# Altium PCB Recepteur.PcbDoc
Units mil, origin at the board's own origin, x right, y up, seen from the top; angles counter-clockwise.
Board outline 3800 x 3795 mil, 2 copper layers (Top Layer, Bottom Layer); 36 components, 38 nets, 132 pads, 0 vias.
Unrouted connection lines stored in the file: 3.
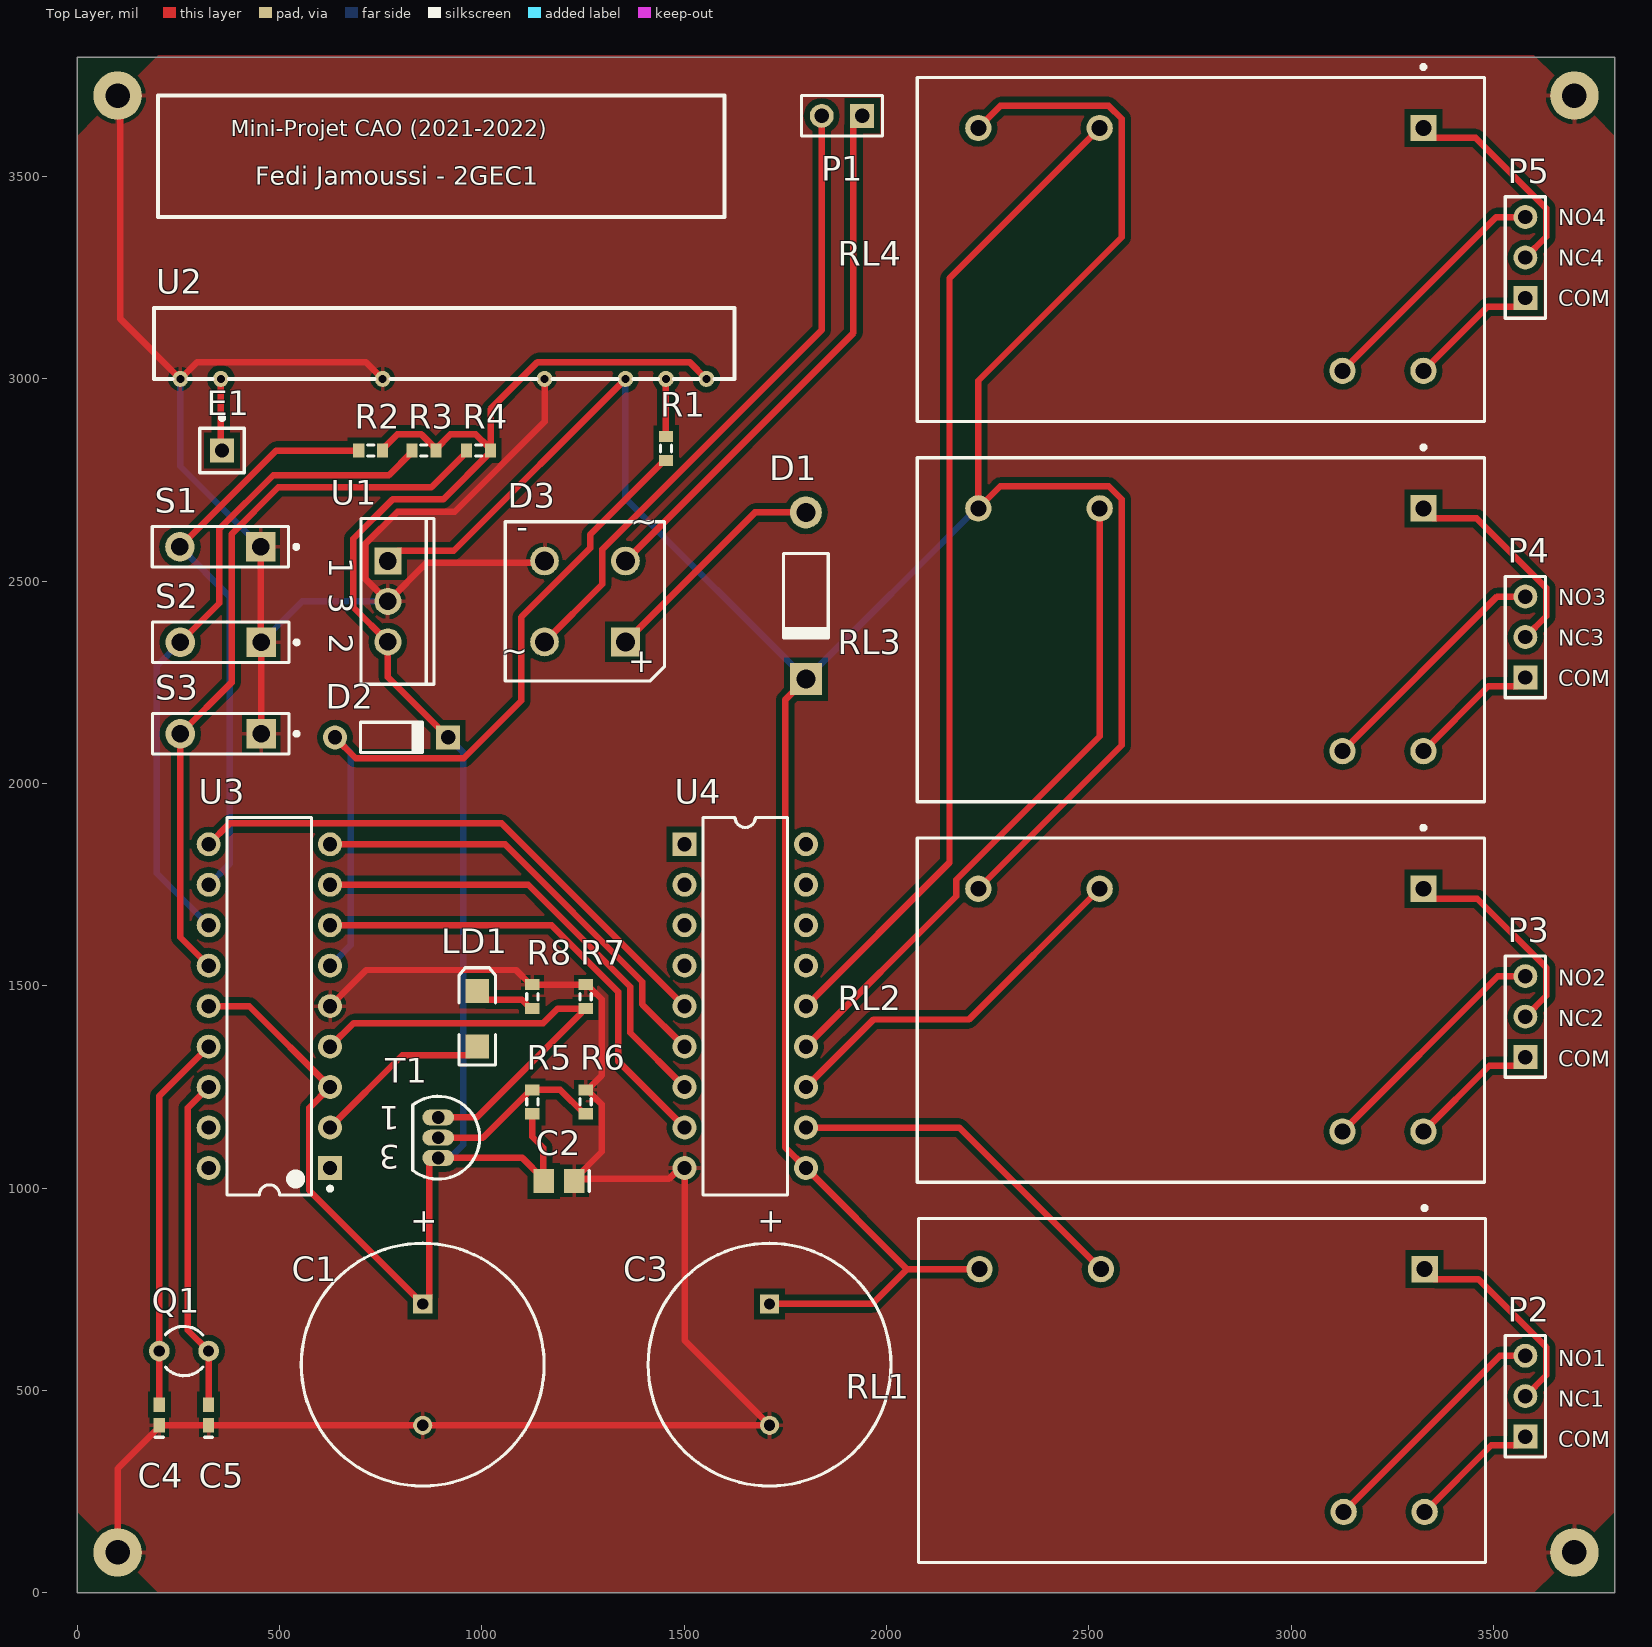
[diagram p0: Top Layer view]
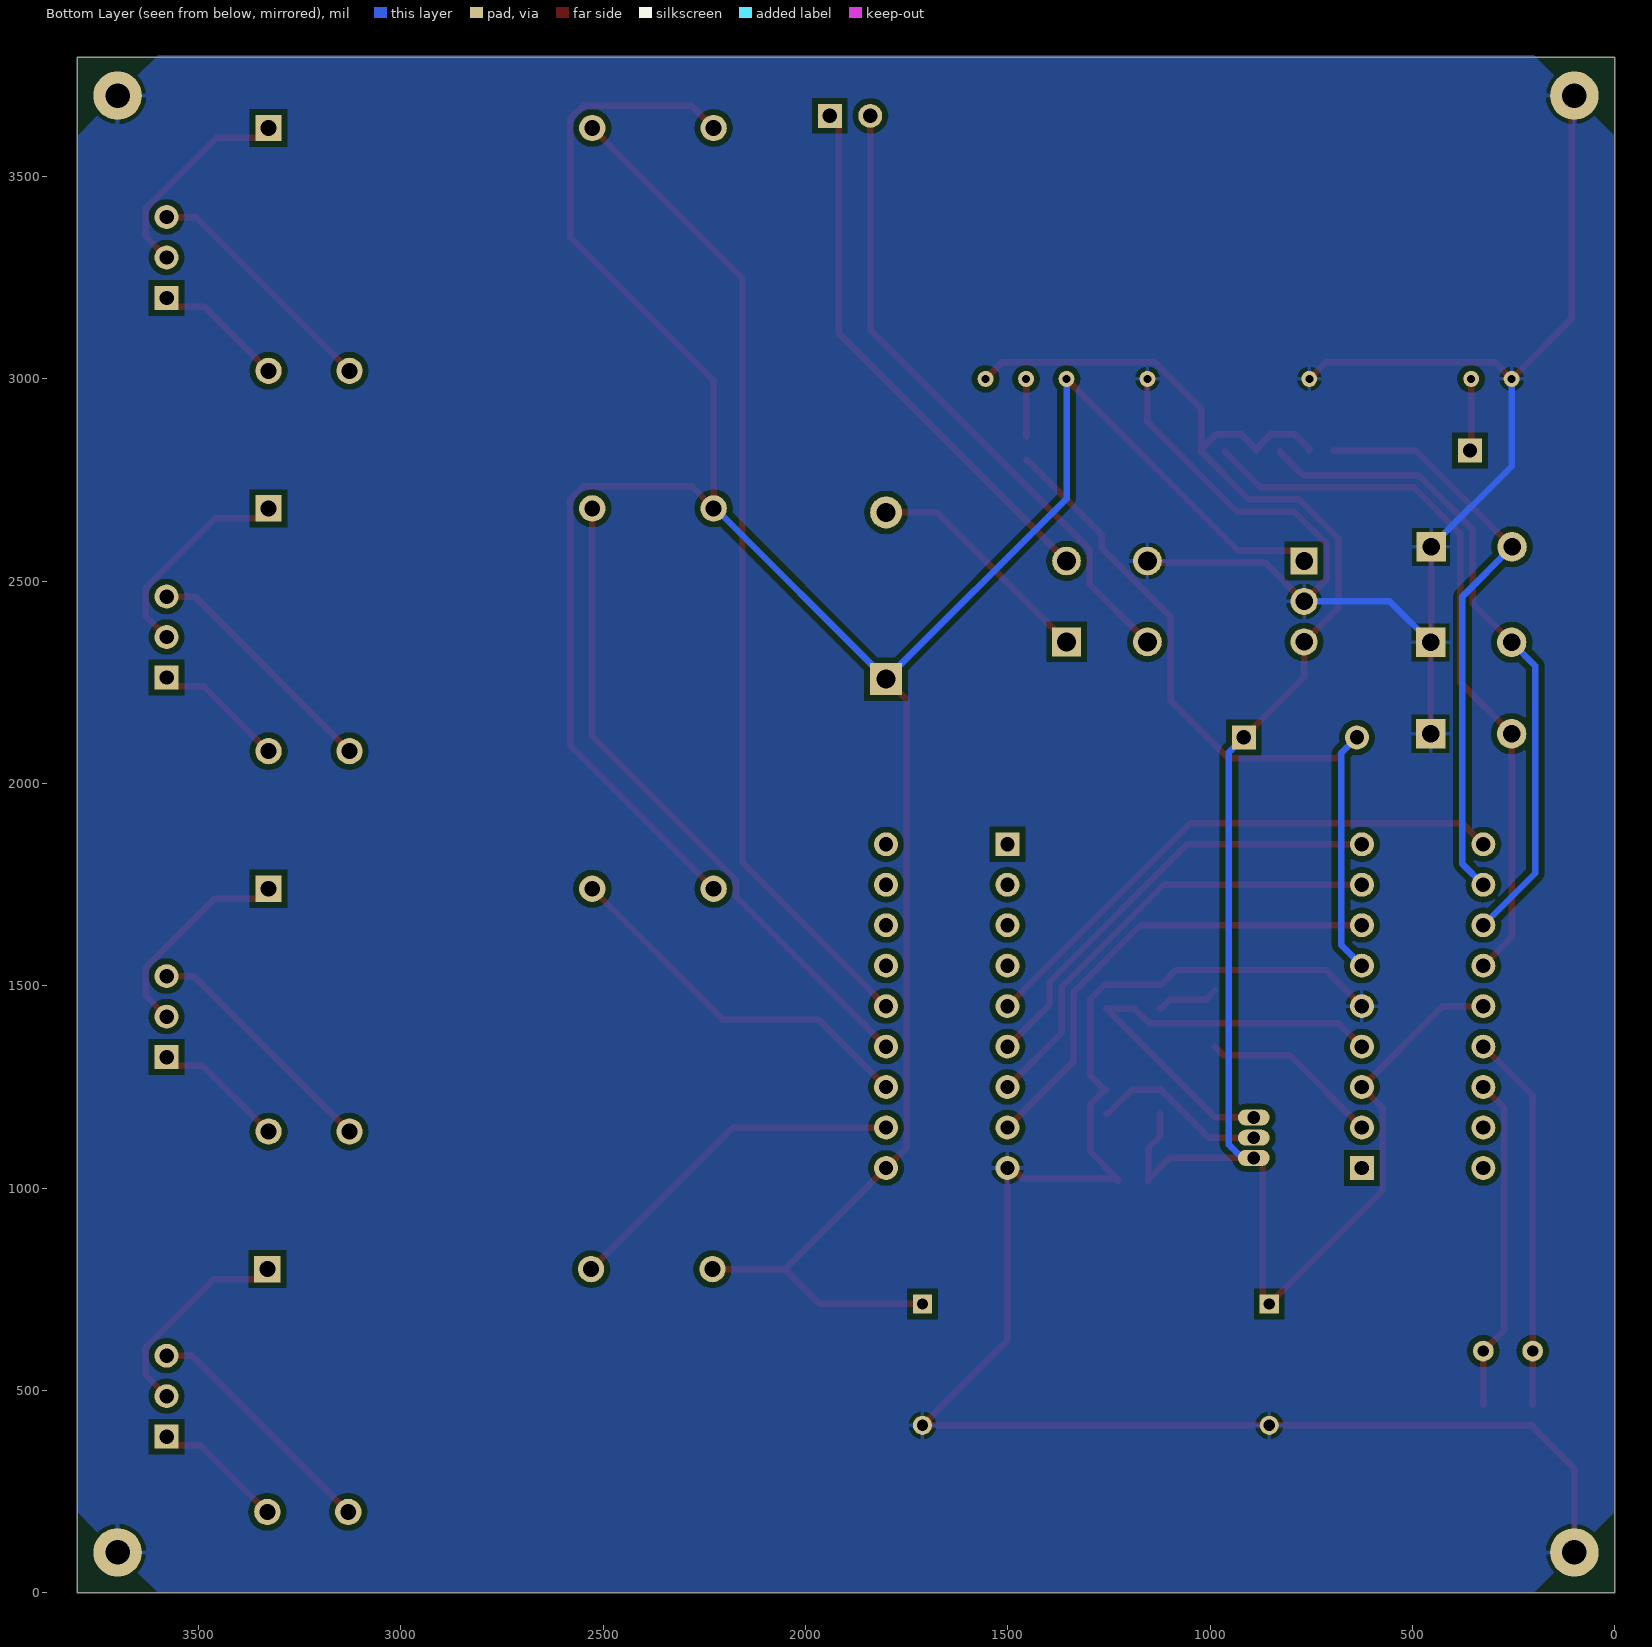
[diagram p1: Bottom Layer view, seen from below]

## Layer stack, top to bottom
Top Solder: solder mask 0.4, Solder Resist, Dk 3.5
Top Layer: signal copper 1.4
Dielectric 1: dielectric 12.6, FR-4, Dk 4.8
Bottom Layer: signal copper 1.4
Bottom Solder: solder mask 0.4, Solder Resist, Dk 3.5

## Board outline
0,3794.95 0,-0.05 3800,-0.05 3800,3794.95

## Design rules (kind name [scope] priority, off if disabled: settings)
Clearance [All] p1: gap=14 ignorepadtopadclearanceinfootprint=FALSE
PolygonConnect [All] p1: connectstyle=Relief reliefconductorwidth=10 reliefentries=4 polygonreliefangle="90 Angle" airgapwidth=10
RoutingVias [All] p1: holewidth=32 width=80 viastyle="Through Hole" minholewidth=28 minwidth=50 maxholewidth=28 maxwidth=50
SolderMaskExpansion [All] p1: expansion=4
Width [All] p1: maxlimit=16 minlimit=16 preferedwidth=16
30 further rules are at their usual default settings.

## Classes and differential pairs
component class Reset: C2 R5 R6 R7 T1
component class Pullup: R2 R3 R4 S1 S2 S3
component class Oscillateur: C4 C5 Q1
component class "Module Reception": E1 R1 U2
component class "Microcontroleur PIC": U3
component class "Indicateur LED": LD1 R8
component class Canaux: C3 P2 P3 P4 P5 RL1 RL2 RL3 RL4 U4
component class Alimentation: C1 D1 D2 D3 P1 U1

## Components (designator, comment, footprint, x,y, rotation, side; value= is the part's Value field where it differs from the comment)
C1 "Cap Pol1" RB7.6-15 854,563.95 r90 top value=100pF
C2 "C0805C" 0805 1190.76,1017.74 r180 top value=100nF
C3 "Cap Pol1" RB7.6-15 1711,563.95 r90 top value=470uF
C4 "C0402" 0402 202.95,439.54 r90 top value=22pF
C5 "C0402" 0402 325,439.54 r90 top value=22pF
D1 "Diode 1N4007" DO-41 1801,2463.95 r270 top
D2 "Diode 1N4148" DO-35 777,2113.95 r0 top
D3 "Bridge1" D-38 1255,2449.95 r180 top
E1 "Antenna" PIN1 358,2822.95 r0 top
LD1 "LED2" 3.2X1.6X1.1 988.76,1418.74 r90 top
P1 "Header 2" HDR1X2 1940,3650 r180 top
P2 "Header 3" HDR1X3 3579,385.95 r90 top
P3 "Header 3" HDR1X3 3579,1323.95 r90 top
P4 "Header 3" HDR1X3 3579,2261.95 r90 top
P5 "Header 3" HDR1X3 3579,3199.95 r90 top
Q1 "XTAL" R38 263.98,597.54 r90 top value=4MHz
R1 "Res3" J1-0603 1455,2827.95 r90 top value=10K
R2 "Res3" J1-0603 725.47,2822.95 r0 top value=10K
R3 "Res3" J1-0603 857,2822.95 r0 top value=10K
R4 "Res3" J1-0603 992,2822.95 r0 top value=10K
R5 "Res3" J1-0603 1124.76,1213.27 r270 top value=470K
R6 "Res3" J1-0603 1256.76,1213.27 r270 top value=2.2M
R7 "Res3" J1-0603 1256.76,1473.46 r270 top value=2.2M
R8 "Res3" J1-0603 1124.76,1473.46 r270 top value=1K
RL1 "Relay" MODULE5B 2780,499.95 r180 top
RL2 "Relay" MODULE5B 2777,1439.95 r180 top
RL3 "Relay" MODULE5B 2777,2379.95 r180 top
RL4 "Relay" MODULE5B 2777,3319.95 r180 top
S1 "SW-SPST" SPST-2 354,2584.95 r180 top
S2 "SW-SPST" SPST-2 355,2348.95 r180 top
S3 "SW-SPST" SPST-2 355,2122.95 r180 top
T1 "BC557B" 29-04 892.29,1124.74 r180 top
U1 "L7805CV" TO220ABN 768,2449.95 r270 top
U2 "RX4MM5/F" RX4MM5/F 870,3089.95 r0 top
U3 "PIC16F84A-04/P" PDIP300-P18 475,1449.85 r180 top
U4 "ULN2803A" A18 1651,1449.85 r270 top

## Footprints (in the part's own frame and the unit in brackets; to place one, negate y for a bottom-side part, rotate by r counter-clockwise, add the part's x,y. Pads: shape width x height; smd on the part's side, far side on the other; paste and mask are expansions set on the pad)
3.2X1.6X1.1 [mm] "SMT LED; 2 Flat Leads"
  rect 1.5x1.5 smd: 1(-1.75,0) 2(1.75,0)
  silkscreen extent -2.9,-1.15 3.2,1.15
29-04 [mm] "TO, Flat Index; 3 In-Line, Axial Leads; Body Dia. 4.8mm; Leads 0.48 x 0.5 mm (max)"
  oval 2x1 hole 0.8: 1(0,-1.27) 2(0,0) 3(0,1.27)
  silkscreen extent -2.6,-2.6 1.6,2.6
0402 [mm] "Chip Capacitor; Body 1.0 x 0.5 mm (LxW typ)"
  rect 0.9x0.7 smd: 1(-0.65,0) 2(0.65,0)
  silkscreen extent -1.4,-0.25 -1.4,0.25
0805 [mm] "Chip Capacitor; Body 2.0 x 1.2 mm (LxW typ)"
  rect 1.3x1.5 smd: 1(-0.95,0) 2(0.95,0)
  silkscreen extent -1.9,-0.65 -1.9,0.65
A18 [mm] "DIP; 18 Leads; Row Spacing 7.62 mm; Pitch 2.54 mm"
  rect 1.5x1.5 hole 0.9: 1(-10.16,-3.81)
  round 1.5 hole 0.9: 2(-7.62,-3.81) 3(-5.08,-3.81) 4(-2.54,-3.81) 5(0,-3.81) 6(2.54,-3.81) 7(5.08,-3.81) 8(7.62,-3.81) 9(10.16,-3.81) 10(10.16,3.81) 11(7.62,3.81) 12(5.08,3.81) 13(2.54,3.81) 14(0,3.81) 15(-2.54,3.81) 16(-5.08,3.81) 17(-7.62,3.81) 18(-10.16,3.81)
  silkscreen extent -11.85,-2.65 11.85,2.65
D-38 [mm] "Bridge Rectifier; 4 Terminals; Body 9.4 x 9.4 mm (typ); Pitch 5.08 mm"
  rect 1.8x1.8 hole 1.2: 1(-2.54,2.54)
  round 1.8 hole 1.2: 2(-2.54,-2.54) 3(2.54,-2.54) 4(2.54,2.54)
  silkscreen extent -5,-5 5,5, body extent -5,-5 5,5, height 9.91
DO-35 [mm] "Diode, Axial; Body 3.8 x 1.9 mm (LxDia. max), Lead Dia. 0.53 mm (max)"
  round 1.5 hole 0.9: 1(-3.55,0)
  rect 1.5x1.5 hole 0.9: 2(3.55,0)
  silkscreen extent -1.95,-0.95 2.05,0.95
DO-41 [mm] "Diode, Axial; Body 5.2 x 2.7 mm (LxDia. max), Lead Dia. 0.86 mm (max)"
  round 2 hole 1.2: 1(-5.23,0)
  rect 2x2 hole 1.2: 2(5.23,0)
  silkscreen extent -2.65,-1.4 2.75,1.4
HDR1X2 [mm] "Connector; Header; 2 Position"
  rect 1.5x1.5 hole 0.9: 1(0,0)
  round 1.5 hole 0.9: 2(2.54,0)
  silkscreen extent -1.27,-1.27 3.81,1.27
HDR1X3 [mm] "Connector; Header; 3 Position"
  rect 1.5x1.5 hole 0.9: 1(0,0)
  round 1.5 hole 0.9: 2(2.54,0) 3(5.08,0)
  silkscreen extent -1.27,-1.27 6.35,1.27
J1-0603 [mm] "Chip Resistor, Body 1.6x0.8mm, IPC High Density"
  rect 0.7x0.9 smd: 1(-0.75,0) 2(0.75,0)
  silkscreen extent -0.2,-0.35 0.2,0.35, body extent -0.85,-0.48 0.85,0.48, height 0.9
MODULE5B [mm] "DIP; 5 Round Pins; Row Space 15.24 mm; Pitch 2.54 mm"
  rect 1.65x1.65 hole 1: 1(-13.97,-7.62)
  round 1.65 hole 1: 2(-13.97,7.62) 3(-8.89,7.62) 4(13.97,-7.62) 5(6.35,-7.62)
  silkscreen extent -17.8,-11.57 17.8,10.8, body extent -17.8,-10.8 17.8,10.8, height 14
PDIP300-P18 [mm] "DIP, 18-Leads, Row Spacing 7.62mm, Pitch 2.54mm, Body 22.9x6.6mm"
  rect 1.5x1.5 hole 0.9: 1(-3.81,10.16)
  round 1.5 hole 0.9: 2(-3.81,7.62) 3(-3.81,5.08) 4(-3.81,2.54) 5(-3.81,0) 6(-3.81,-2.54) 7(-3.81,-5.08) 8(-3.81,-7.62) 9(-3.81,-10.16) 10(3.81,-10.16) 11(3.81,-7.62) 12(3.81,-5.08) 13(3.81,-2.54) 14(3.81,0) 15(3.81,2.54) 16(3.81,5.08) 17(3.81,7.62) 18(3.81,10.16)
  silkscreen extent -3.94,-11.85 2.65,11.85, body extent -3.6,-11.8 3.6,11.8, height 5.34
PIN1 [mm] "Generic Antenna; 1 Lead"
  rect 1.5x1.5 hole 0.9: 1(0,0)
  silkscreen extent -1.4,-1.4 1.4,2.17
R38 [mm] "Crystal, Thru-Hole; 2 Leads; Body 3.1 x 8.2 mm (Dia.xH)"
  round 1.3 hole 0.7: 1(0,1.55) 2(0,-1.55)
  silkscreen extent -1.55,-1.19 1.55,1.17
RB7.6-15 [mm] "Polarized Capacitor (Radial); 2 Leads"
  rect 1.2x1.2 hole 0.7: 1(3.81,0)
  round 1.2 hole 0.7: 2(-3.81,0)
  silkscreen extent -7.62,-7.62 7.62,7.62
RX4MM5/F [mm] "RF Signal Receiver"
  round 1 hole 0.5: 2(-15.621,-2.286) 3(-13.081,-2.286) 7(-2.921,-2.286) 11(7.239,-2.286) 13(12.319,-2.286) 14(14.859,-2.286) 15(17.399,-2.286)
  silkscreen extent -17.27,-2.29 19.18,2.16
SPST-2 [mm] "Switch; 2 Leads"
  rect 1.85x1.85 hole 1.1: 1(-2.54,0)
  round 1.85 hole 1.1: 2(2.54,0)
  silkscreen extent -4.89,-1.27 4.28,1.27
TO220ABN [mm] "TO, Thru-Hole, Vertical, Heatsink Mounted; 3 In-Line Leads; Pitch 2.54 mm; Pin sequence 1, 3, 2"
  rect 1.7x1.7 hole 1.1: 1(-2.54,0)
  round 1.7 hole 1.1: 2(2.54,0) 3(0,0)
  silkscreen extent -5.2,-1.7 5.2,2.9

## Part data
C1 C3: "Polarized Capacitor (Radial)", LatestRevisionDate=17-Jul-2002, LatestRevisionNote="Re-released for DXP Platform.", PackageDescription="Polarized Capacitor (Radial); 2 Leads", PackageReference=RB7.6-15, Published=8-Jun-2000, Publisher="Altium Limited"
C2: library part C0805, "Ceramic Chip Capacitor - Standard", PackageDocument=Mar-2001, Code_IPC=2012[0805], Code_JEITA=0805, ComponentLink1Description="Manufacturer Link", ComponentLink1URL=http://www.kemet.com/, ComponentLink2Description=Datasheet, ComponentLink2URL=http://www.kemet.com/kemet/web/homepage/kechome.nsf/vapubfilesname/F3102TA.pdf/$file/F3102TA.pdf, DatasheetDocument=Mar-2001, LatestRevisionDate=19-Mar-2004, LatestRevisionNote="Silkscreen size reduced.", Note="Footprint corresponds to dimensions for bulk cassette packaging. This case size has tightened tolerances.", PackageReference=0805, Published=17-Jul-2002, Publisher="Altium Limited"
C4 C5: "Ceramic Chip Capacitor - Standard", PackageDocument=Mar-2001, Code_IPC="1005 [0402]", Code_JEITA=0402, ComponentLink1Description="Manufacturer Link", ComponentLink1URL=http://www.kemet.com/, ComponentLink2Description=Datasheet, ComponentLink2URL=http://www.kemet.com/kemet/web/homepage/kechome.nsf/vapubfilesname/F3102TA.pdf/$file/F3102TA.pdf, DatasheetDocument=Mar-2001, LatestRevisionDate=19-Mar-2004, LatestRevisionNote="Silkscreen size reduced.", Note="Footprint corresponds to dimensions for bulk cassette packaging. This case size has tightened tolerances.", PackageReference=0402, Published=17-Jul-2002, Publisher="Altium Limited"
D1: "1 Amp General Purpose Rectifier", Code_JEDEC=DO-204-AL, ComponentLink1Description="Manufacturer Link", ComponentLink1URL=http://www.fairchildsemi.com/, ComponentLink2Description=Datasheet, ComponentLink2URL=http://www.fairchildsemi.com/ds/1N%2F1N4001.pdf, DatasheetVersion=1998, LatestRevisionDate=17-Jul-2002, LatestRevisionNote="Re-released for DXP Platform.", PackageDescription="Diode, Axial; Body 5.2 x 2.7 mm (LxDia. max), Lead Dia. 0.86 mm (max)", PackageReference=DO-41, PackageVersion=Aug-1999, Published=8-Jun-2000, Publisher="Altium Limited"
D2: "High Conductance Fast Diode", Code_JEDEC=DO-204-AH, ComponentLink1Description="Manufacturer Link", ComponentLink1URL=http://www.fairchildsemi.com/, ComponentLink2Description=Datasheet, ComponentLink2URL=http://www.fairchildsemi.com/ds/1N%2F1N4148.pdf, DatasheetVersion=1997, LatestRevisionDate=17-Jul-2002, LatestRevisionNote="Re-released for DXP Platform.", PackageDescription="Diode, Axial; Body 3.8 x 1.9 mm (LxDia. max), Lead Dia. 0.53 mm (max)", PackageReference=DO-35, Published=8-Jun-2000, Publisher="Altium Limited"
D3: "Full Wave Diode Bridge", DatasheetVersion=E2732B, LatestRevisionDate=29-May-2009, LatestRevisionNote="Sch pins A & K swapped.", PackageDescription="Bridge Rectifier; 4 Terminals; Body 9.4 x 9.4 mm (typ); Pitch 5.08 mm", PackageReference=D-38, Published=8-Jun-2000, Publisher="Altium Limited"
E1: "Generic Antenna", LatestRevisionDate=17-Jul-2002, LatestRevisionNote="Re-released for DXP Platform.", PackageReference=PIN1, Published=24-Mar-1999, Publisher="Altium Limited"
LD1: "Typical RED, GREEN, YELLOW, AMBER GaAs LED", LatestRevisionDate=17-Jul-2002, LatestRevisionNote="Re-released for DXP Platform.", PackageDescription="SM LED; 2 Flat Leads", PackageReference=3.2X1.6X1.1, PackageVersion=Feb-2002, Published=8-Jun-2000, Publisher="Altium Limited"
P1: "Header, 2-Pin", LatestRevisionDate=17-Jul-2002, LatestRevisionNote="Re-released for DXP Platform.", Publisher="Altium Limited"
P2 P3 P4 P5: "Header, 3-Pin", LatestRevisionDate=17-Jul-2002, LatestRevisionNote="Re-released for DXP Platform.", Publisher="Altium Limited"
Q1: "Crystal Oscillator", LatestRevisionDate=17-Jul-2002, LatestRevisionNote="Re-released for DXP Platform.", PackageDescription="Crystal, Thru-Hole; 2 Leads; Body 3.1 x 8.2 mm (Dia.xH)", PackageReference=R38, Published=8-Jun-2000, Publisher="Altium Limited"
R1 R2 R3 R4 R5 R6 R7 R8: "Resistor", LatestRevisionDate=29-May-2009, LatestRevisionNote="IPC-7351 Footprint Added.", PackageDescription="Chip Resistor", PackageReference=J1-0603, Published=8-Jun-2000, Publisher="Altium Limited"
RL1 RL2 RL3 RL4: "SPDT Relay", LatestRevisionDate=17-Jul-2002, LatestRevisionNote="Re-released for DXP Platform.", PackageReference=MODULE5B, Published=8-Jun-2000, Publisher="Altium Limited"
S1 S2 S3: "Single-Pole, Single-Throw Switch", LatestRevisionDate=17-Jul-2002, LatestRevisionNote="Re-released for DXP Platform.", PackageDescription="Switch; 2 Leads", PackageReference=SPST-2, Published=24-Mar-1999, Publisher="Altium Limited"
T1: "Amplifier Transistor PNP Silicon", ComponentLink1Description="Manufacturer Link", ComponentLink1URL=http://www.onsemi.com/site/products/landing?taxonomyID=194, ComponentLink2Description=Datasheet, ComponentLink2URL=http://www.onsemi.com/pub/Collateral/BC556B-D.PDF, DatasheetVersion=1991, LatestRevisionDate=17-Jul-2002, LatestRevisionNote="Re-released for DXP Platform.", PackageDescription="TO, Flat Index; 3 In-Line, Axial Leads; Body Dia. 4.8mm; Leads 0.48 x 0.5 mm (max)", PackageReference=29-04, PackageVersion=1996, Published=29-Sep-2000, Publisher="Altium Limited"
U1: "Positive Voltage Regulator", ComponentLink1Description="Manufacturer Link", ComponentLink1URL=http://www.st.com/, DatasheetVersion=Dec-1998, LatestRevisionDate=17-Jul-2002, LatestRevisionNote="Re-released for DXP Platform.", Note="Tab is connected to pin 3 (GND).", PackageDescription="TO, Thru-Hole, Vertical, Heatsink Mounted; 3 In-Line Leads; Pitch 2.54 mm; Pin sequence 1, 3, 2", PackageReference=TO220ABN, PackageVersion=Jun-1998, Published=24-Aug-2001, Publisher="Altium Limited"
U2: "RF Signal Receiver", ComponentLink1Description="Manufacturer Link", ComponentLink1URL=https://www.aurelwireless.com/, ComponentLink2Description=Datasheet, DatasheetVersion=2012, LatestRevisionDate=25-Oct-2012, PackageReference=TO-92A, Publisher="FJ Custom"
U3: "Enhanced FLASH/EEPROM 8-Bit Microcontroller, 1K (x14-Bit words) FLASH, 68 Bytes RAM, 4 MHz, 18-Pin PDIP, Standard VDD Range, Commercial Temperature", Supplier Part Number 1=PIC16F84A-04/P-ND, Code_JEDEC=MS-001, ComponentLink1Description=Datasheet, ComponentLink1URL=http://ww1.microchip.com/downloads/en/DeviceDoc/35007b.pdf, ComponentLink2Description="Packaging Specification", ComponentLink2URL=http://www.microchip.com/stellent/groups/techpub_sg/documents/packagingspec/en012702.pdf, ComponentLink3Description="Microchip.com Home", ComponentLink3URL=http://www.microchip.com/, DatasheetVersion="revB, Aug-2001", LatestRevisionDate=29-Jan-2009, LatestRevisionNote="Sch. layout revised. 3D Model Removed.", PackageDescription="18-Lead Plastic Dual In-Line (P) - 300 mil Body [PDIP]", PackageReference=PDIP300-P18, PackageVersion="revBB, Aug-2009", Published=11-Oct-2004, Publisher="Altium Limited", Supplier 1=Digi-Key, Supplier 2=Farnell, Supplier 3=Farnell, Supplier Part Number 2=1523947, Supplier Part Number 3=9760865
U4: "High-Voltage, High-Current Darlington Array", ComponentLink1Description="Manufacturer Link", ComponentLink1URL=http://www.allegromicro.com/, DatasheetVersion=1999, LatestRevisionDate=06-Jun-2005, LatestRevisionNote="Stylized 3D Model Added.", PackageDescription="DIP; 18 Leads; Row Spacing 7.62 mm; Pitch 2.54 mm", PackageReference=A18, PackageVersion=1999, Published=13-Oct-2000, Publisher="Altium Limited"

## Free pads (board coordinates)
  round 120 hole 60: 1(100,3699.95) 2(100,99.95) 3(3700,99.95) 4(3700,3699.95)

## Nets (pads, with @x,y where several pads share a name; then routed paths per layer and width w, separated by ;. In a path a pad name is that pad's centre, name@x,y a point inside that pad or via, vN(x,y) a via of type N, cw(c..) or ccw(c..) an arc to the next point about the centre after c; other vN are vias at no path point)
GND: C1.2 C2.1 C3.2 C4.1 C5.1 D3.3 pad.1 pad.2 pad.3 pad.4 R6.1 R7.1 R8.1 S1.1 S2.1 S3.1 U1.3 U2.2 U2.7 U2.11 U3.5 U4.9 | length 8004.1
  Top Layer w16: pad.2 100,307.06 202.95,410.02 C4.1 C5.1 C1.2 C3.2 1501,623.95 U4.9 1489.35,1049.85 1462.43,1022.93 1233.35,1022.93 C2.1 1228.17,1021.68 1296.48,1090 1296.48,1207.02 R6.1@1260.7,1242.8 ; pad.1 107,3692.95 107,3147.95 U2.2 296.69,3041.64 713.31,3041.64 U2.7 ; S1.1 454,2349.95 S2.1 S3.1 ; U3.5 714.32,1539.17 1084.64,1539.17 1120.83,1502.98 R8.1 R7.1 1260.7,1502.98 1296.48,1467.2 1296.48,1278.58 R6.1@1260.7,1242.8 ; D3.3 1150.46,2545.42 863.46,2545.42 U1.3 712.54,2505.42 712.54,2592.53 791.96,2671.95 933.14,2671.95 1155,2893.82 U2.11 ; R6.1 R6.1@1260.7,1242.8
  Bottom Layer w16: U2.2 255,2783.95 S1.1 ; S2.1 556,2449.95 U1.3
NetC1_1: C1.1 C2.2 D2.2 R2.2 R3.2 R4.2 R5.2 T1.3 U1.2 U2.15 U3.3 U3.14 | length 5048
  Top Layer w16: U3.14 425,1449.85 U3.3 573.47,1198.32 573.47,994.48 C1.1 869.62,729.57 869.62,1063.95 880.42,1074.74 T1.3 1100.3,1074.74 C2.2@1152.11,1022.93 ; R2.2 755,2826.89 790.78,2862.67 850.75,2862.67 R3.2@886.53,2826.89 ; R3.2 R3.2@886.53,2826.89 ; D2.2 768,2262.72 U1.2 682.54,2435.42 682.54,2604.96 779.53,2701.95 904.47,2701.95 1021.53,2819.02 R4.2 R4.2@1021.53,2832.67 ; R5.2 1124.76,1127.15 1152.11,1099.8 C2.2@1152.11,1022.93 ; C2.2 1153.36,1021.68 C2.2@1152.11,1022.93 ; U2.15 1513.31,3041.64 1137.73,3041.64 1021.53,2925.43 R4.2@1021.53,2832.67 ; R3.2@886.53,2826.89 922.31,2862.67 985.36,2862.67 1015.36,2832.67 R4.2@1021.53,2832.67
  Bottom Layer w16: T1.3 918.3,1074.74 926.62,1083.06 929.24,1083.06 953.66,1107.48 953.66,2077.05 D2.2
NetC3_1: C3.1 D1.2 RL1.4 RL2.4 RL3.4 RL4.4 U1.1 U2.13 U4.10 | length 7464.8
  Top Layer w16: U1.1 793.46,2575.42 930.46,2575.42 U2.13 ; C3.1 1964.9,713.95 2050.9,799.95 ; D1.2 1749.47,2206.52 1749.47,1101.38 U4.10 2050.9,799.95 ; RL2.4 2581.48,2094.43 2581.48,2702.52 2549.57,2734.43 2281.48,2734.43 RL3.4 2227,2995.3 2581.48,3349.78 2581.48,3642.52 2549.57,3674.43 2281.48,3674.43 RL4.4 ; RL1.4 2050.9,799.95
  Bottom Layer w16: U2.13 1355,2704.05 D1.2 2227,2684.05 RL3.4
NetC4_2: C4.2 Q1.1 U3.15 | length 935.3
  Top Layer w16: C4.2 Q1.1 202.95,1227.8 U3.15
NetC5_2: C5.2 Q1.2 U3.16 | length 827.4
  Top Layer w16: C5.2 Q1.2 273.47,649.07 273.47,1198.32 U3.16
NetD1_1: D1.1 D3.1 | length 578.5
  Top Layer w16: D3.1 1674.91,2669.86 D1.1
NetD2_1: D2.1 R1.1 U3.6 | length 1886.5
  Top Layer w16: D2.1 688.76,2062.42 955.4,2062.42 1097.57,2204.59 1097.57,2411.3 1267.57,2581.3 1267.57,2614.93 1451.06,2798.42 R1.1
  Bottom Layer w16: U3.6 676.53,1601.38 676.53,2074.66 D2.1
NetD3_2: D3.2 P1.1 | length 1342.4
  Top Layer w16: D3.2 1918.47,3113.42 1918.47,3628.47 P1.1
NetD3_4: D3.4 P1.2 | length 1583.8
  Top Layer w16: D3.4 1297.57,2492.52 1297.57,2578.38 1840,3120.82 P1.2
NetE1_1: E1.1 U2.3 | length 178.2
  Top Layer w16: U2.3 355,2825.95 E1.1
NetLD1_1: LD1.1 U3.2 | length 446.6
  Top Layer w16: U3.2 803.47,1328.32 967.24,1328.32 LD1.1
NetLD1_2: LD1.2 R8.2 | length 154.1
  Top Layer w16: LD1.2 1010.29,1466.11 1098.64,1466.11 1120.83,1443.93 R8.2
NetP2_1: P2.1 RL1.2 | length 326
  Top Layer w16: RL1.2 3494.47,364.42 3557.47,364.42 P2.1
NetP2_2: P2.2 RL1.1 | length 523
  Top Layer w16: RL1.1 3354.48,775.47 3462.35,775.47 3630.53,607.3 3630.53,537.48 P2.2
NetP2_3: P2.3 RL1.3 | length 608.9
  Top Layer w16: RL1.3 3516,585.95 P2.3
NetP3_1: P3.1 RL2.2 | length 328.2
  Top Layer w16: RL2.2 3489.47,1302.42 3557.47,1302.42 P3.1
NetP3_2: P3.2 RL2.1 | length 526.8
  Top Layer w16: RL2.1 3351.48,1715.47 3460.35,1715.47 3630.53,1545.3 3630.53,1475.48 P3.2
NetP3_3: P3.3 RL2.3 | length 611.1
  Top Layer w16: RL2.3 3511,1523.95 P3.3
NetP4_1: P4.1 RL3.2 | length 327.4
  Top Layer w16: RL3.2 3487.47,2240.42 3557.47,2240.42 P4.1
NetP4_2: P4.2 RL3.1 | length 527.7
  Top Layer w16: RL3.1 3351.48,2655.47 3458.35,2655.47 3630.53,2483.3 3630.53,2413.48 P4.2
NetP4_3: P4.3 RL3.3 | length 610.2
  Top Layer w16: RL3.3 3509,2461.95 P4.3
NetP5_1: P5.1 RL4.2 | length 326.6
  Top Layer w16: RL4.2 3485.47,3178.42 3557.47,3178.42 P5.1
NetP5_2: P5.2 RL4.1 | length 528.5
  Top Layer w16: RL4.1 3351.48,3595.47 3456.35,3595.47 3630.53,3421.3 3630.53,3351.48 P5.2
NetP5_3: P5.3 RL4.3 | length 609.4
  Top Layer w16: RL4.3 3507,3399.95 P5.3
NetR1_2: R1.2 U2.14 | length 142.5
  Top Layer w16: R1.2 U2.14
NetR2_1: R2.1 S1.2 U3.11 | length 1447.7
  Top Layer w16: S1.2 492,2822.95 R2.1
  Bottom Layer w16: S1.2 376.53,2462.42 376.53,1801.38 U3.11
NetR3_1: R3.1 S2.2 U3.12 | length 1655
  Top Layer w16: S2.2 351.46,2445.42 351.46,2628.79 484.63,2761.95 770.41,2761.95 827.47,2819.02 R3.1
  Bottom Layer w16: S2.2 196.58,2290.53 196.58,1778.27 U3.12
NetR4_1: R4.1 S3.2 U3.13 | length 1816.8
  Top Layer w16: U3.13 255,1619.85 S3.2 381.46,2249.42 381.46,2616.36 497.05,2731.95 875.41,2731.95 962.47,2819.02 R4.1
NetR5_1: R5.1 R6.2 T1.2 | length 437.8
  Top Layer w16: T1.2 1002.77,1124.74 1120.83,1242.8 R5.1 1193.77,1242.8 1252.83,1183.74 R6.2
NetR7_2: R7.2 T1.1 U3.4 | length 1145.1
  Top Layer w16: U3.4 683.3,1408.15 1151.59,1408.15 1187.37,1443.93 R7.2@1252.83,1443.93 ; T1.1 987.58,1174.74 1247.05,1434.21 1247.05,1438.15 R7.2@1252.83,1443.93 ; R7.2 R7.2@1252.83,1443.93
NetRL1_5: RL1.5 U4.11 | length 873.9
  Top Layer w16: U4.11 2180.1,1149.85 RL1.5
NetRL2_5: RL2.5 U4.12 | length 929
  Top Layer w16: U4.12 1968,1416.85 2203.9,1416.85 RL2.5
NetRL3_5: RL3.5 U4.13 | length 1630.8
  Top Layer w16: U4.13 2172.52,1721.37 2172.52,1762.52 2527,2117 RL3.5
NetRL4_5: RL4.5 U4.14 | length 2470.8
  Top Layer w16: U4.14 2155.82,1804.66 2155.82,3248.77 RL4.5
NetU3_7: U3.7 U4.8 | length 1183.6
  Top Layer w16: U3.7 1172.51,1649.85 1336.75,1485.6 1336.75,1314.09 U4.8
NetU3_8: U3.8 U4.7 | length 1149.8
  Top Layer w16: U3.8 1114.94,1749.85 1366.75,1498.03 1366.75,1384.09 U4.7
NetU3_9: U3.9 U4.6 | length 1116.1
  Top Layer w16: U3.9 1057.36,1849.85 1396.75,1510.46 1396.75,1454.09 U4.6
NetU3_10: U3.10 U4.5 | length 1384.4
  Top Layer w16: U3.10 376.53,1901.38 1049.47,1901.38 U4.5
pads on no net: U3.1 U3.17 U3.18 U4.1 U4.2 U4.3 U4.4 U4.15 U4.16 U4.17 U4.18

## Polygon pours and split planes (outlines as drawn)
GND on Bottom Layer "Top Layer-No Net" (solid, remove dead copper, pour order 24): 200,3799.95 200,3800 3600,3800 3700,3700 3700,3699.95 3700.05,3699.95 3800,3600 3800,199.95 3600.05,0 200,0 100.05,99.95 100,99.95 100,100 0,200 0,3600 0.05,3600
GND on Top Layer "Top Layer-No Net" (solid, remove dead copper, pour order 22): 200,3799.95 200,3800 3600,3800 3700,3700 3700,3699.95 3700.05,3699.95 3800,3600 3800,199.95 3600.05,0 200,0 100.05,99.95 100,99.95 100,100 0,200 0,3600 0.05,3600

## Silkscreen, mask and mechanical layers (free items; w line width, h text height)
Top Overlay:
  lines w10: 200,3400 200,3700 1600,3700 1600,3400 200,3400
  text "Mini-Projet CAO (2021-2022)" at 380,3600 h40
  text "Fedi Jamoussi - 2GEC1" at 440,3480 h45
  text "NO4" at 3660,3380 h40
  text "NC4" at 3660,3280 h40
  text "COM" at 3660,3180 h40
  text "NO3" at 3660,2440 h40
  text "NC3" at 3660,2340 h40
  text "COM" at 3660,2240 h40
  text "NO2" at 3660,1500 h40
  text "NC2" at 3660,1400 h40
  text "COM" at 3660,1300 h40
  text "NO1" at 3660,560 h40
  text "NC1" at 3660,460 h40
  text "COM" at 3660,360 h40
Mechanical 1:
  lines w10: -420,60 -400,0 ; -420,3740 -400,3800 ; -410,0 -390,0 ; -410,3800 -390,3800 ; -400,1619.09 -400,0 ; -400,2180.91 -400,3800 ; -400,3799.95 3800,3799.95 3800,-400.05 ; -380,60 -400,0 ; -380,3740 -400,3800 ; 0,-410.05 0,-390.05 ; 0,3799.95 0,-400.05 ; 60,-420.05 0,-400.05 ; 60,-380.05 0,-400.05 ; 1619.09,-400.05 0,-400.05 ; 2180.91,-400.05 3800,-400.05 ; 3740,-420.05 3800,-400.05 ; 3740,-380.05 3800,-400.05 ; 3800,-410.05 3800,-390.05 ; 3800,0 -400,0
  text "3800 (mil)" at -364.01,1629.09 h60 r90
  text "3800 (mil)" at 1629.09,-436.04 h60

## Text inside footprints (layer, text, board x,y; h text height)
C1: Top Overlay "+" at 883.01,884.11 h59.06 r90
C3: Top Overlay "+" at 1740.01,884.11 h59.06 r90
D3: Top Overlay "~" at 1115,2349.95 h59.05 r180; Top Overlay "~" at 1435,2669.95 h59.05 r180; Top Overlay "-" at 1115,2649.95 h59.05 r180; Top Overlay "+" at 1428.62,2325.39 h59.06 r180
T1: Top Overlay "3" at 796.98,1106.36 h59.05 r180; Top Overlay "1" at 796.98,1202.66 h59.05 r180
U1: Top Overlay "1" at 623.31,2559.79 h59.06 r270; Top Overlay "2" at 623.31,2369.64 h59.06 r270; Top Overlay "3" at 623.31,2469.64 h59.06 r270